# Altium PCB chip.PcbDoc (part 1 of 2)
Units mil, origin at the board's own origin, x right, y up, seen from the top; angles counter-clockwise.
Board outline 3130 x 2410 mil, 2 copper layers (Top Layer, Bottom Layer); 96 components, 117 nets, 462 pads, 172 vias.
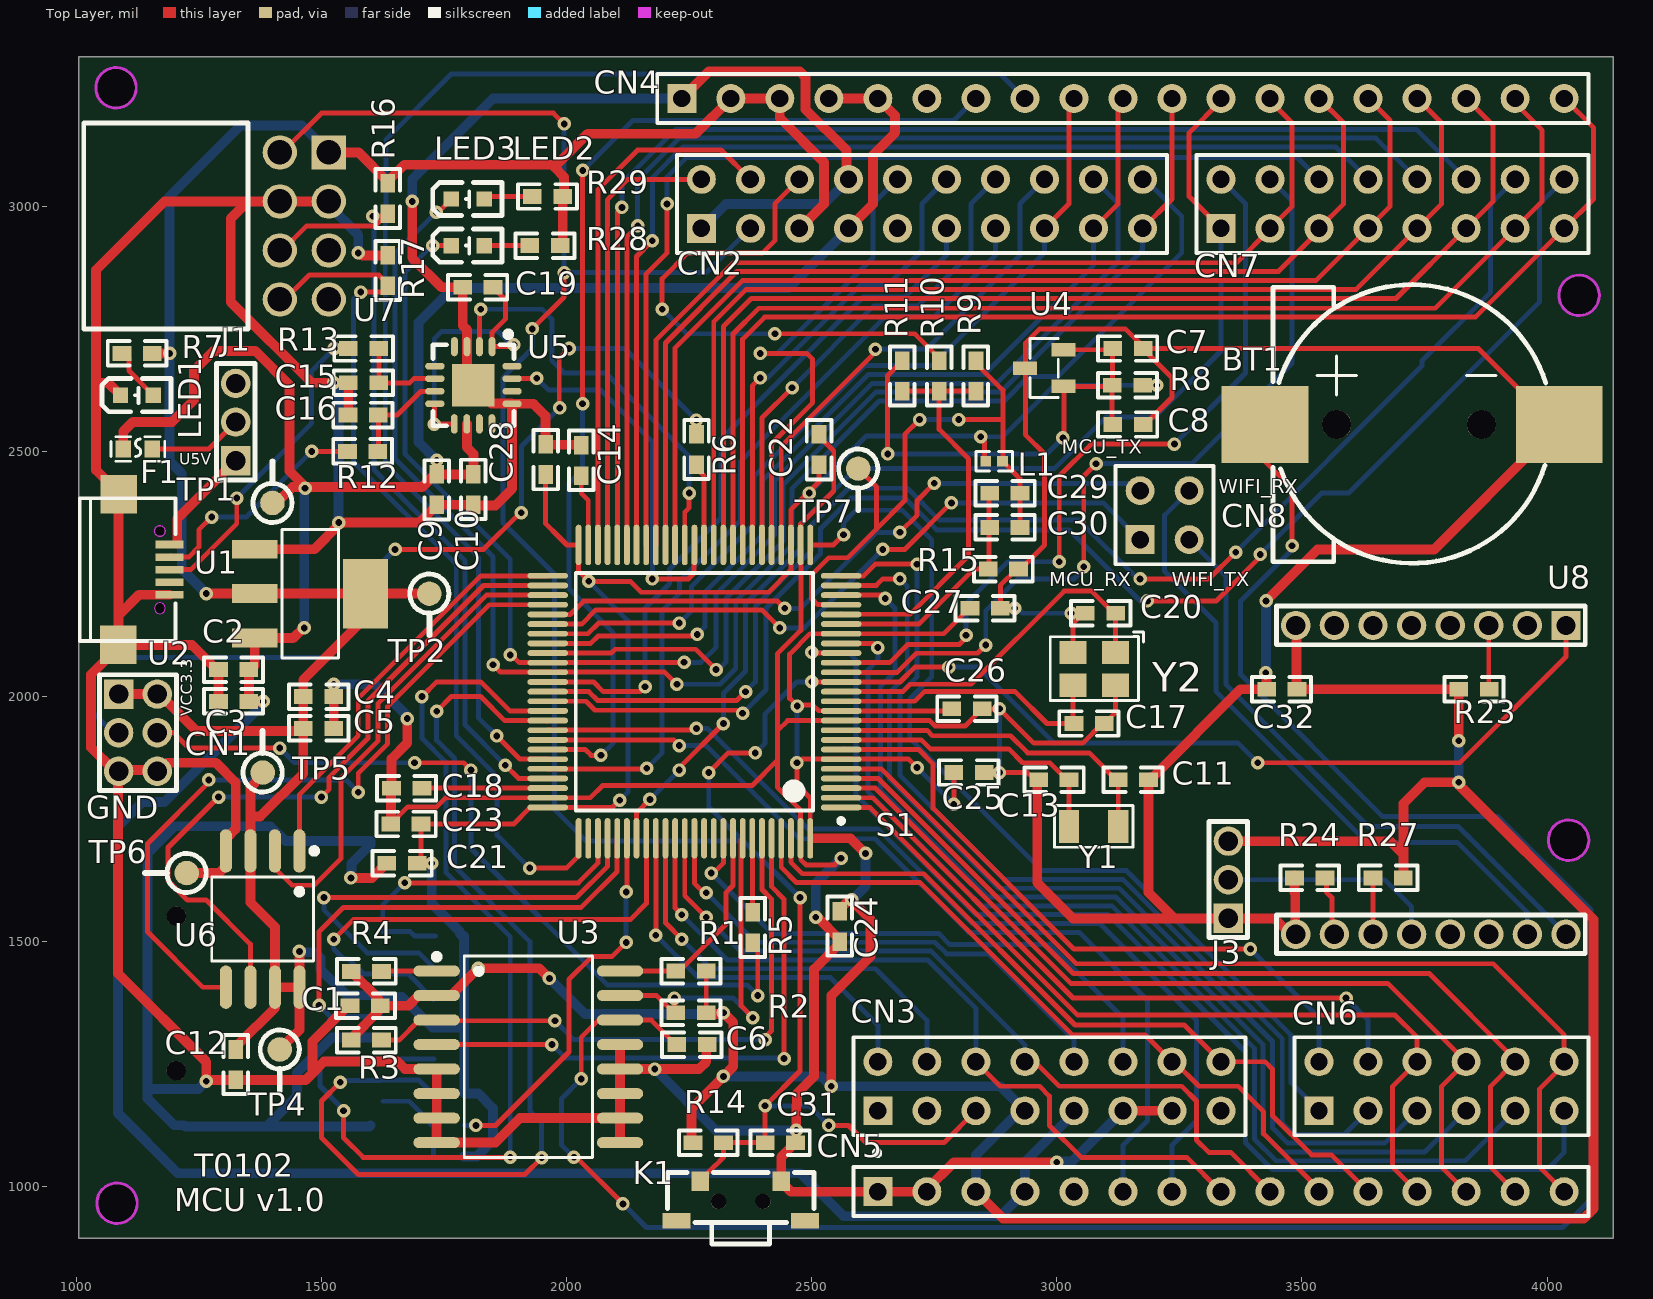
[diagram p0: Top Layer view]
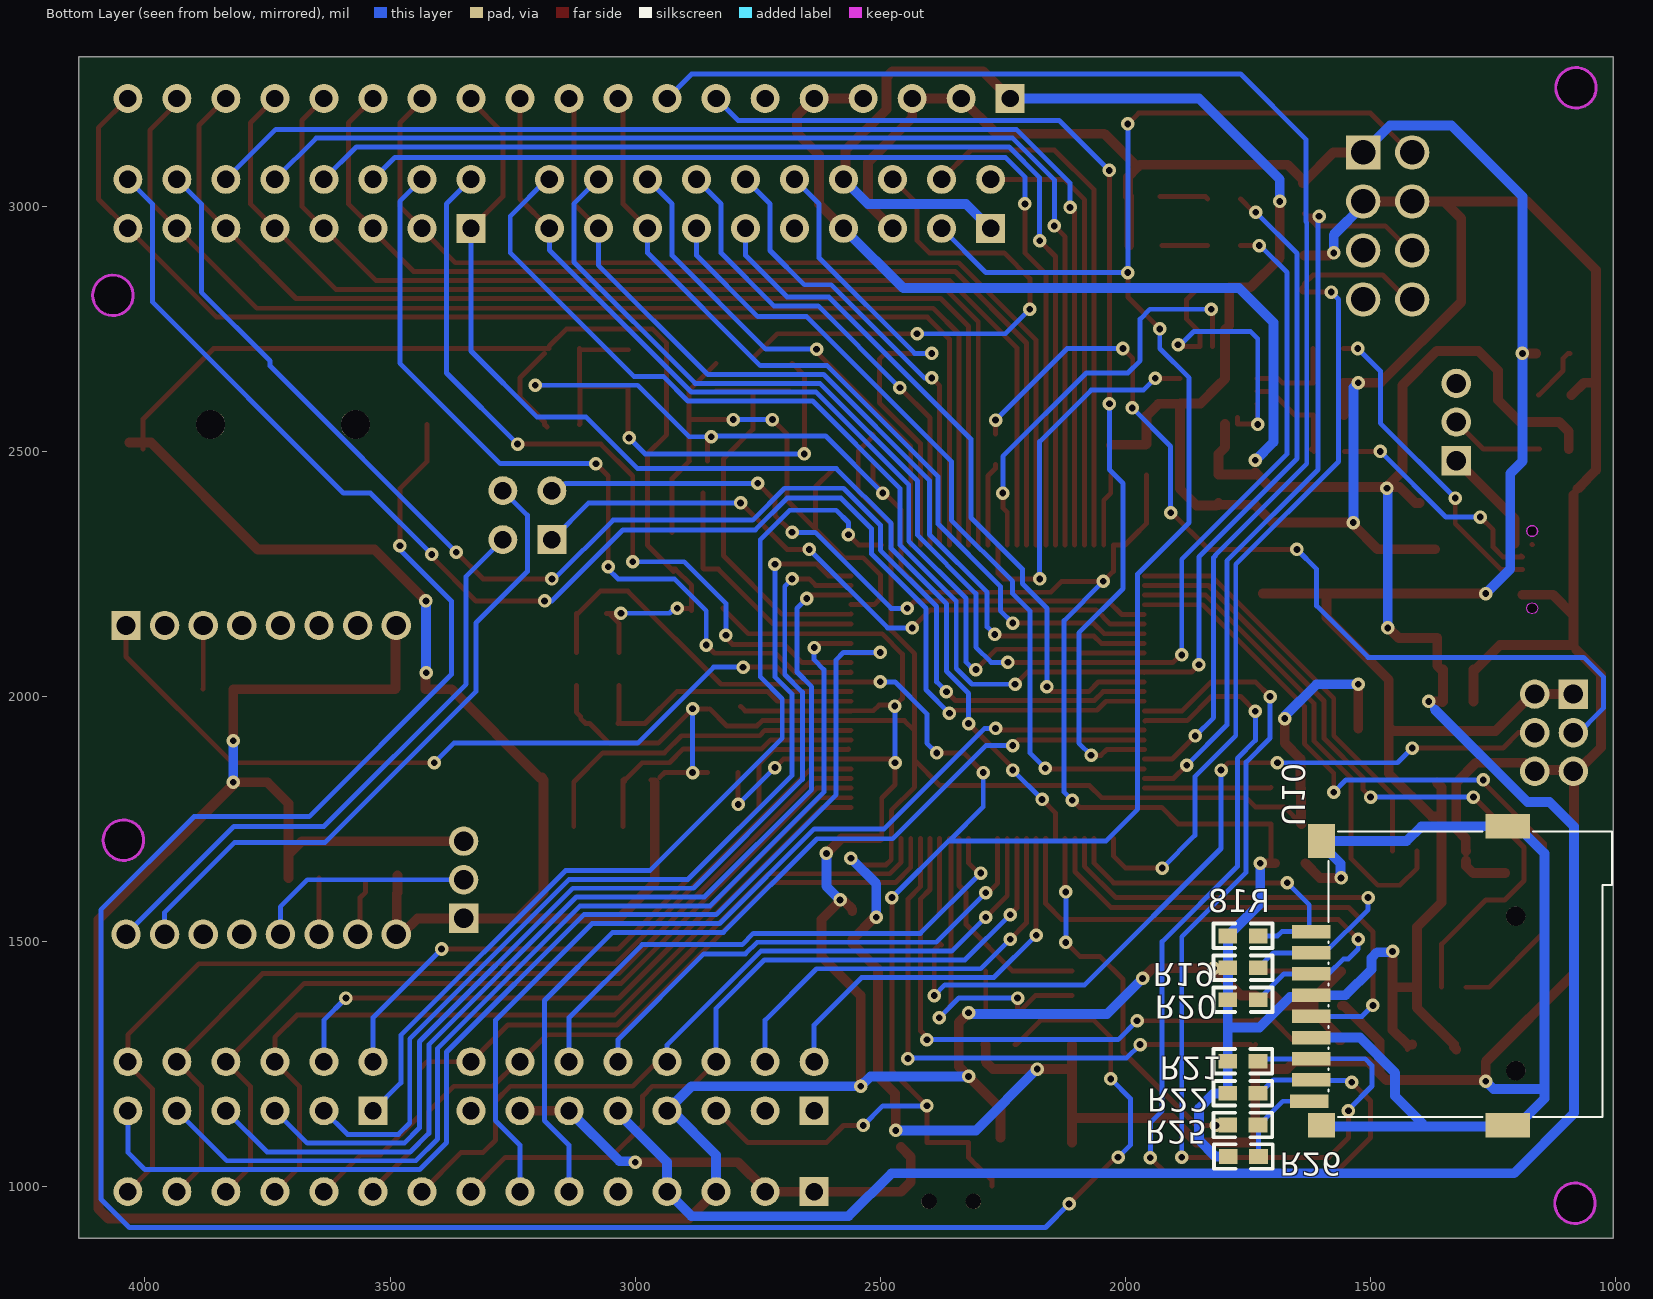
[diagram p1: Bottom Layer view, seen from below]
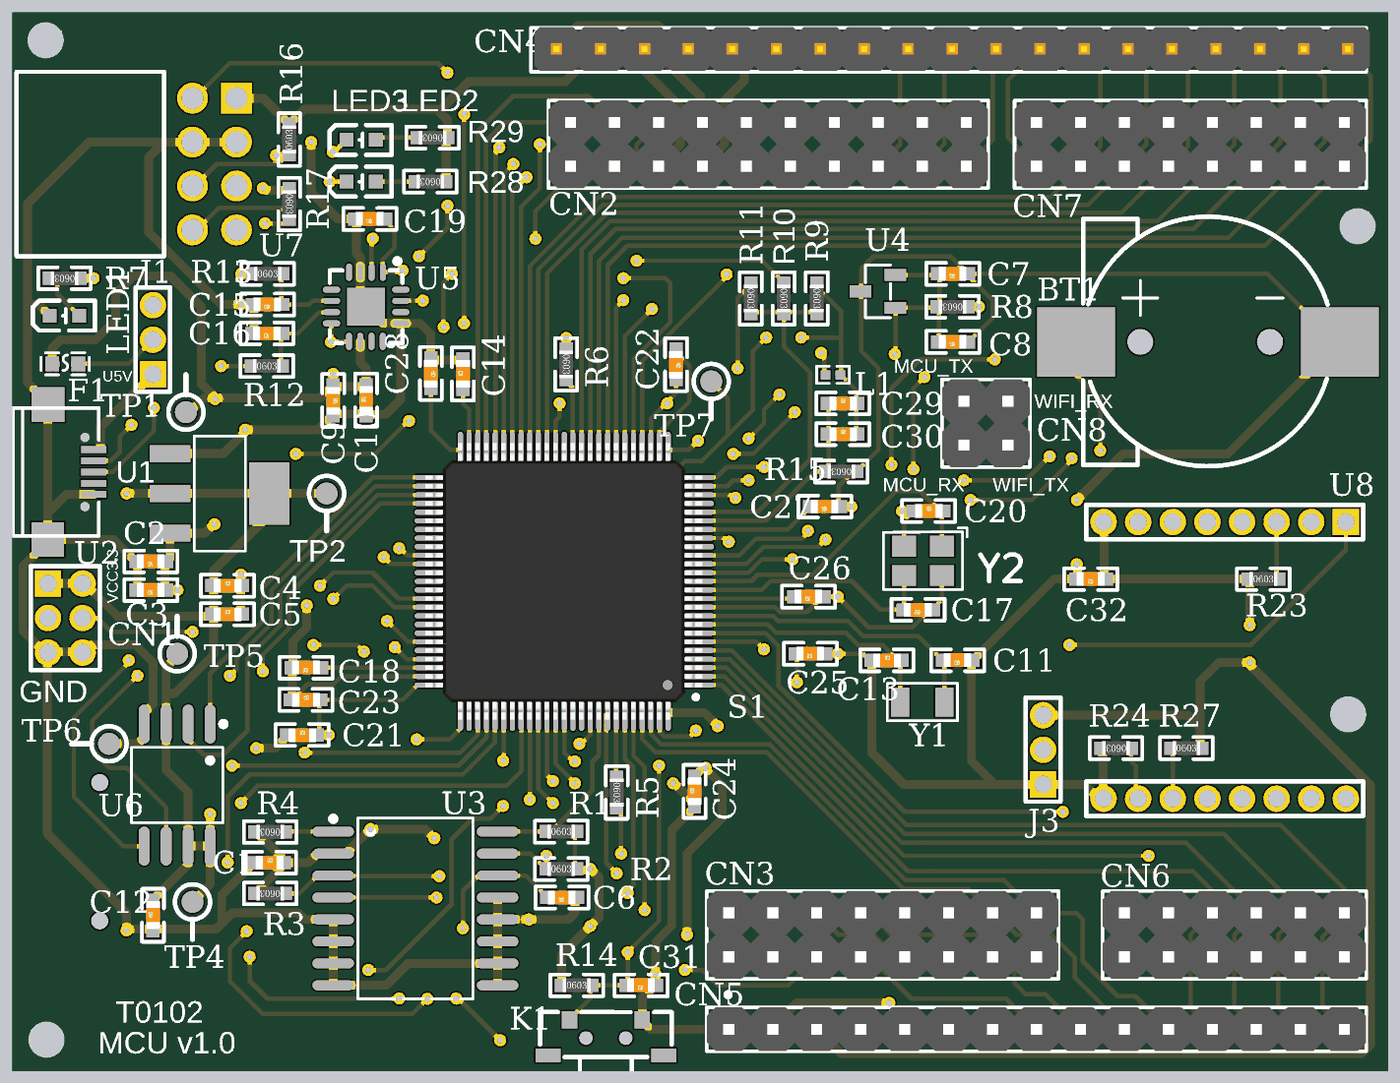
[diagram p3: 3D render of the assembled board from above, using the file's embedded part models]
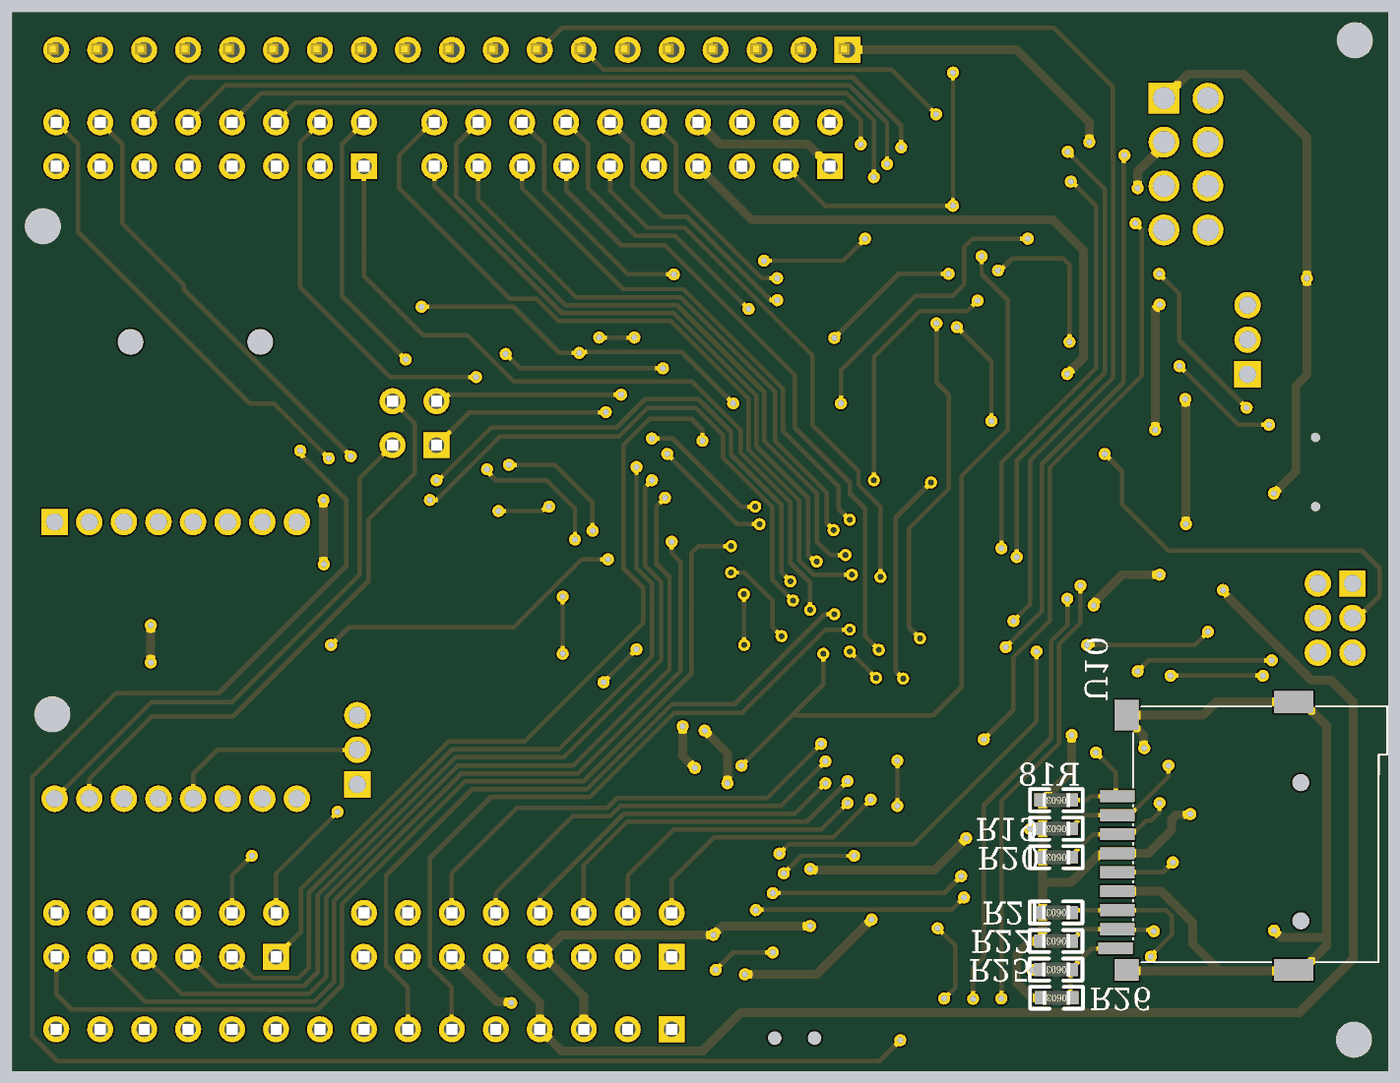
[diagram p4: 3D render of the assembled board from below, using the file's embedded part models]

## Layer stack, top to bottom
Top Solder: solder mask 0.4, Solder Resist, Dk 3.5
Top Layer: signal copper 1.4
Dielectric 1: dielectric 12.6, FR-4, Dk 4.8
Bottom Layer: signal copper 1.4
Bottom Solder: solder mask 0.4, Solder Resist, Dk 3.5

## Board outline
1005,895 4135,895 4135,3305 1005,3305
cut-out: 1080.82,3200.47 cw(c1080.82,3241.81) 1039.48,3241.81 cw(c1080.82,3241.81) 1080.82,3283.15 cw(c1080.82,3241.81) 1122.16,3241.81 cw(c1080.82,3241.81)
cut-out: 4043.97,1665.61 cw(c4043.97,1706.95) 4002.63,1706.95 cw(c4043.97,1706.95) 4043.97,1748.29 cw(c4043.97,1706.95) 4085.31,1706.95 cw(c4043.97,1706.95)
cut-out: 1082.89,925.01 cw(c1082.89,966.35) 1041.55,966.35 cw(c1082.89,966.35) 1082.89,1007.69 cw(c1082.89,966.35) 1124.23,966.35 cw(c1082.89,966.35)
cut-out: 4065.42,2777.03 cw(c4065.42,2818.37) 4024.08,2818.37 cw(c4065.42,2818.37) 4065.42,2859.7 cw(c4065.42,2818.37) 4106.76,2818.37 cw(c4065.42,2818.37)
cut-out: 1005,3230

## Design rules (kind name [scope] priority, off if disabled: settings)
Clearance [All] p1: gap=4 ignorepadtopadclearanceinfootprint=FALSE
MinimumSolderMaskSliver [All] p1: minsoldermaskwidth=0
PolygonConnect [All] p1: connectstyle=Relief reliefconductorwidth=10 reliefentries=4 polygonreliefangle="90 Angle" airgapwidth=10
RoutingVias [All] p1: holewidth=28 width=50 viastyle="Through Hole" minholewidth=28 minwidth=50 maxholewidth=28 maxwidth=50
SilkToSilkClearance [All] p1: silktosilkclearance=0
SilkToSolderMaskClearance [IsPad] p1: minsilkscreentomaskgap=0 clearancetoexposedcopper=TRUE
SolderMaskExpansion [All] p1: expansion=4
Width Width_Power [InNetClass('New Class')] p1: maxlimit=30 minlimit=10 preferedwidth=20
Width [All] p2: maxlimit=20 minlimit=10 preferedwidth=10
27 further rules are at their usual default settings.

## Components (designator, comment, footprint, x,y, rotation, side; value= is the part's Value field where it differs from the comment)
BT1 "Battery" CR1220-2 3329.41,2644.77 r0 top locked value="CR1220-2 电池卧式底座"
C1 "0.1uF" "0603 - CAP" 1558.23,1369.26 r0 top value="100nF(104) ±10% 10V"
C2 "10uF" "0603 - CAP" 1352,2055 r180 top value="10uF(106) ±10% 10V"
C3 "0.1uF" "0603 - CAP" 1352,1990 r180 top value="100nF(104) ±10% 10V"
C4 "10uF" "0603 - CAP" 1463,2000 r0 top value="10uF(106) ±10% 10V"
C5 "0.1uF" "0603 - CAP" 1463,1935 r0 top value="100nF(104) ±10% 10V"
C6 "0.1uF" "0603 - CAP" 2287.01,1290 r180 top value="100nF(104) ±10% 10V"
C7 "0.1uF" "0603 - CAP" 3176,2710 r180 top value="100nF(104) ±10% 10V"
C8 "0.1uF" "0603 - CAP" 3176,2555 r180 top value="100nF(104) ±10% 10V"
C9 "0.1uF" "0603 - CAP" 1735,2453.1 r270 top value="100nF(104) ±10% 10V"
C10 "4.7uF" "0603 - CAP" 1809.88,2391.1 r90 top value="4.7uF ±10% 6.3V"
C11 "22pF" "0603 - CAP" 3187,1830 r180 top value="22pF ±1% 10V"
C12 "0.1uF" "0603 - CAP" 1325,1218 r90 top value="100nF(104) ±10% 10V"
C13 "22pF" "0603 - CAP" 2963,1830 r0 top value="22pF ±1% 10V"
C14 "2.2uF" "0603 - CAP" 2030,2450.5 r90 top value="2.2uF(225) ±10% 10V"
C15 "47pF" "0603 - CAP" 1617,2640.25 r180 top value="47pF ±1% 10V"
C16 "47pF" "0603 - CAP" 1616,2574.25 r180 top value="47pF ±1% 10V"
C17 "22pF" "0603 - CAP" 3097,1945 r180 top value="22pF ±1% 10V"
C18 "2.2uF" "0603 - CAP" 1704.95,1813.15 r180 top value="2.2uF(225) ±10% 10V"
C19 "0.1uF" "0603 - CAP" 1850,2835 r180 top value="100nF(104) ±10% 10V"
C20 "22pF" "0603 - CAP" 3058,2170 r0 top value="22pF ±1% 10V"
C21 "4.7uF" "0603 - CAP" 1633,1660 r0 top value="4.7uF ±10% 6.3V"
C22 "0.1uF" "0603 - CAP" 2515,2535 r270 top value="100nF(104) ±10% 10V"
C23 "0.1uF" "0603 - CAP" 1641.1,1740 r0 top value="100nF(104) ±10% 10V"
C24 "0.1uF" "0603 - CAP" 2557.17,1500.17 r90 top value="100nF(104) ±10% 10V"
C25 "0.1uF" "0603 - CAP" 2852,1845 r180 top value="100nF(104) ±10% 10V"
C26 "0.1uF" "0603 - CAP" 2848.1,1975 r180 top value="100nF(104) ±10% 10V"
C27 "0.1uF" "0603 - CAP" 2885,2180 r180 top value="100nF(104) ±10% 10V"
C28 "0.1uF" "0603 - CAP" 1957.3,2514.88 r270 top value="100nF(104) ±10% 10V"
C29 "1uF" "0603 - CAP" 2863,2415 r0 top value="1uF(105) ±10% 6.3V"
C30 "0.1uF" "0603 - CAP" 2863,2345 r0 top value="100nF(104) ±10% 10V"
C31 "0.1uF" "0603 - CAP" 2467,1090 r180 top value="100nF(104) ±10% 10V"
C32 "0.1uF" "0603 - CAP" 3490,2015 r180 top value="100nF(104) ±10% 10V"
CN1 "HDR2X3" "HDR2X3 - duplicate1" 1211.05,2048.18 r270 top value="杜邦2.0排针直插 镀金 6P 双排 针座连接器"
CN2 "Header 10x2" HDR2X10 2275,2955 r0 top
CN3 "Header 8x2" HDR2X8 2635,1155 r0 top locked
CN4 "Header 19" "HDR1X19 - duplicate" 2235,3220 r0 top locked
CN5 "Header 15" HDR1X15 2635,990 r0 top locked
CN6 "Header 6x2" HDR2X6 3535,1155 r0 top
CN7 "Header 8x2" HDR2X8 3335,2955 r0 top
CN8 "Header 2X2" "HDR2X2 - duplicate" 3170,2320 r0 top locked value="排针 2X2 2.54"
F1 "FUSE" PTC 1181.34,2479.99 r180 top value=1A/32V
J1 "跳线帽" "HDR1X3 - duplicate1" 1437.21,2650.08 r90 top locked
J3 "跳线帽" "HDR1X3 - duplicate1" 3462.21,1716.34 r90 top
K1 "Key" "Key 3*6*3.5侧按" 2205.96,1030.34 r0 top value="轻触开关 3*6*3.5侧按 直径0.6定位柱 白体黑头 250力度"
L1 "120R DCR:0.12 0402" "120R DCR=0.12 0402" 2832.86,2501.37 r0 top value="120Ω(120R) ±1%"
LED1 "LED" 0603-LED 1049,2642 r0 top
LED2 "LED" 0603-LED 1724,2947 r0 top
LED3 "LED" 0603-LED 1724,3042 r0 top
R1 "4.7K" "0603 - RES" 2223,1440 r0 top value="4.7KΩ(472) ±5%"
R2 "4.7K" "0603 - RES" 2223,1355 r0 top value="4.7KΩ(472) ±5%"
R3 "4.7K" "0603 - RES" 1622.5,1299.26 r180 top value="4.7KΩ(472) ±5%"
R4 "4.7K" "0603 - RES" 1622.5,1439.26 r180 top value="4.7KΩ(472) ±5%"
R5 "1K" "0603 - RES" 2380,1560 r270 top value="1KΩ(1K) ±1% 50PPM"
R6 "1K" "0603 - RES" 2265,2535 r270 top value="1KΩ(1K) ±1% 50PPM"
R7 "1K" "0603 - RES" 1155,2700 r180 top value="1KΩ(1K) ±1% 50PPM"
R8 "10K" "0603 - RES" 3175,2635 r180 top value="10KΩ ±1%"
R9 "0" "0603 - RES" 2835,2685 r270 top value="0Ω(0000) ±1%"
R10 "0" "0603 - RES" 2760,2685 r270 top value="0Ω(0000) ±1%"
R11 "0" "0603 - RES" 2685,2685 r270 top value="0Ω(0000) ±1%"
R12 "27R" "0603 - RES" 1553,2500 r0 top value="27Ω ±1%"
R13 "27R" "0603 - RES" 1555,2710 r0 top value="27Ω ±1%"
R14 "10K" "0603 - RES" 2258,1090 r0 top value="10KΩ ±1%"
R15 "10K" "0603 - RES" 2922,2260 r180 top value="10KΩ ±1%"
R16 "10K" "0603 - RES" 1635,2985 r90 top value="10KΩ ±1%"
R17 "10K" "0603 - RES" 1635,2900 r270 top value="10KΩ ±1%"
R18 "10K" "0603 - RES" 1729,1511.7 r0 bottom value="10KΩ ±1%"
R19 "10K" "0603 - RES" 1729,1446.7 r0 bottom value="10KΩ ±1%"
R20 "10K" "0603 - RES" 1729,1381.7 r0 bottom value="10KΩ ±1%"
R21 "10K" "0603 - RES" 1729.44,1255.95 r0 bottom value="10KΩ ±1%"
R22 "10K" "0603 - RES" 1729.44,1190.95 r0 bottom value="10KΩ ±1%"
R23 "10K" "0603 - RES" 3820,2015 r0 top value="10KΩ ±1%"
R24 "10K" "0603 - RES" 3547,1630 r180 top value="10KΩ ±1%"
R25 "0" "0603 - RES" 1729.44,1125.95 r0 bottom value="0Ω(0000) ±1%"
R26 "10K" "0603 - RES" 1728.4,1061.7 r0 bottom value="10KΩ ±1%"
R27 "10K" "0603 - RES" 3645,1630 r0 top value="10KΩ ±1%"
R28 "1K" "0603 - RES" 1987,2920 r180 top value="1KΩ(1K) ±1% 50PPM"
R29 "1K" "0603 - RES" 1992,3020 r180 top value="1KΩ(1K) ±1% 50PPM"
S1 "STM32F427VIT6" LQFP100_M 2260.79,2010 r180 top locked
TP1 "TP" Test-1 1400,2395 r270 top
TP2 "TP" Test-1 1720,2210 r90 top
TP4 "TP" Test-1 1415,1280 r90 top
TP5 "TP" Test-1 1380,1845 r270 top
TP6 "TP" Test-1 1225,1640 r0 top
TP7 "TP" Test-1 2595,2465 r90 top locked
U1 "ME1117A33B3G-3.3" ME1117A33B3G 1542.06,2084.95 r180 top value=AMS1117-3.3
U2 "Micro USB" USB-C46389 1043.83,2060.82 r0 top value=C46389
U3 "DS3231SN#" SOIC-16_300mil 2054.75,1547.02 r270 top locked value=DS3231SN#T&R
U4 "TL431BIDBZR" SOT-23-3 2929.39,2705.91 r0 top
U5 "FT230XQ" QFN-16_4x4x065p 1902.42,2541.81 r180 top value=FT230XQ-R
U6 "W25Q" SOIC-8_208mil 1487.12,1418.29 r180 top locked value=W25Q80DVSSIG
U7 "SWD" SWD-8p 1550,3175.18 r270 top value=8P,脚距2.54mm
U8 "ESP-12F" "ESP-12 slice" 3177.88,2010.21 r270 top locked value=ESP-12F(ESP8266MOD)
U10 "TF Card" TF-015 1568,1107.3 r90 bottom locked value=TF-015
Y1 "32.768KHZ 12.5PF 20ppm" SMD-3215-2p 2996,1780 r0 top
Y2 "SMD_3225" "SMD-3225 4p" 3167.69,1990.49 r180 top value="25MHz 10PF 30PPM -40~+85℃"

## Footprints (in the part's own frame and the unit in brackets; to place one, negate y for a bottom-side part, rotate by r counter-clockwise, add the part's x,y. Pads: shape width x height; smd on the part's side, far side on the other; paste and mask are expansions set on the pad)
"120R DCR=0.12 0402" [mm]
  rect 0.566x0.54 smd: 1(0.562,-0.543) 2(1.428,-0.543)
  silkscreen extent 0.05,-1.04 1.94,-0.04
"0603 - CAP" [mil]
  rect 38x30 smd: 1(0,0) 2(62,0)
  silkscreen extent -29,-25 92,25, body extent 1,-16 63,15, height 12
"0603 - RES" [mil]
  rect 38x30 smd: 1(0,0) 2(62,0)
  silkscreen extent -29,-25 91,25, body extent 0,-16 62,16, height 18
0603-LED [mil]
  rect 31.5x31.5 smd: 1(108,-27) 2(41,-27)
  silkscreen extent 3,-61 144,7
CR1220-2 [mm]
  rect 4.5x4 smd: 1(2.428,-2.28) 2(17.668,-2.28)
  round 1.5 hole 1.5 unplated: ""(6.136,-2.28) ""(13.629,-2.28)
  silkscreen extent 2.83,-9.47 16.97,4.97
"ESP-12 slice" [mil] "2.00mm 8pin  排母"
  rect 60x60 hole 39.37: 1(-134.79,860.82)
  round 60 hole 39.37: 2(-134.79,782.08) 3(-134.79,703.34) 4(-134.79,624.6) 5(-134.79,545.86) 6(-134.79,467.12) 7(-134.79,388.38) 8(-134.79,309.64) 15(495.21,309.64) 16(495.21,388.38) 17(495.21,467.12) 18(495.21,545.86) 19(495.21,624.6) 20(495.21,703.34) 21(495.21,782.08) 22(495.21,860.82)
  silkscreen extent -174,270 535,900
"HDR1X3 - duplicate1" [mil] "2mm 3 pin 排针"
  rect 60x60 hole 39.37: 1(-168.82,112.21)
  round 60 hole 39.37: 2(-90.08,112.21) 3(-11.34,112.21)
  Top Layer region: 3,4 3,4 3,4 3,4
  Top Layer region: 3,4 3,4 3,4 3,4
  Top Layer region: 3,4 3,4 3,4 3,4
  silkscreen extent -208,73 29,152
HDR1X15 [mm] "Connector; Header; 15 Position"
  rect 1.5x1.5 hole 0.9: 1(0,0)
  round 1.5 hole 0.9: 2(2.54,0) 3(5.08,0) 4(7.62,0) 5(10.16,0) 6(12.7,0) 7(15.24,0) 8(17.78,0) 9(20.32,0) 10(22.86,0) 11(25.4,0) 12(27.94,0) 13(30.48,0) 14(33.02,0) 15(35.56,0)
  silkscreen extent -1.27,-1.27 36.83,2.14, body extent -1.27,-1.27 36.83,1.27, height 8.54
"HDR1X19 - duplicate" [mm] "Connector; Header; 19 Position"
  rect 1.5x1.5 hole 0.9: 1(0,0)
  round 1.5 hole 0.9: 2(2.54,0) 3(5.08,0) 4(7.62,0) 5(10.16,0) 6(12.7,0) 7(15.24,0) 8(17.78,0) 9(20.32,0) 10(22.86,0) 11(25.4,0) 12(27.94,0) 13(30.48,0) 14(33.02,0) 15(35.56,0) 16(38.1,0) 17(40.64,0) 18(43.18,0) 19(45.72,0)
  silkscreen extent -1.27,-1.27 46.99,1.27, body extent -1.07,-1.22 47.19,1.32, height 10.1
"HDR2X2 - duplicate" [mm] "Connector; Header; 2x2 Position"
  rect 1.5x1.5 hole 0.9: 1(0,0)
  round 1.5 hole 0.9: 2(0,2.54) 3(2.54,0) 4(2.54,2.54)
  silkscreen extent -1.27,-1.27 3.81,3.81, body extent -1.27,-1.27 3.81,3.81, height 8.54
"HDR2X3 - duplicate1" [mil] "2mm 2x3pin 排针"
  rect 60x60 hole 39.37: 1(43.18,-124.79)
  round 60 hole 39.37: 2(43.18,-46.05) 3(121.92,-124.79) 4(121.92,-46.05) 5(200.66,-124.79) 6(200.66,-46.05)
  silkscreen extent 4,-164 240,-7
HDR2X6 [mm] "Connector; Header; 6x2 Position"
  rect 1.5x1.5 hole 0.9: 1(0,0)
  round 1.5 hole 0.9: 2(0,2.54) 3(2.54,0) 4(2.54,2.54) 5(5.08,0) 6(5.08,2.54) 7(7.62,0) 8(7.62,2.54) 9(10.16,0) 10(10.16,2.54) 11(12.7,0) 12(12.7,2.54)
  silkscreen extent -1.27,-1.27 13.97,3.81, body extent -1.27,-1.27 13.97,3.81, height 8.54
HDR2X8 [mm] "Connector; Header; 8x2 Position"
  rect 1.5x1.5 hole 0.9: 1(0,0)
  round 1.5 hole 0.9: 2(0,2.54) 3(2.54,0) 4(2.54,2.54) 5(5.08,0) 6(5.08,2.54) 7(7.62,0) 8(7.62,2.54) 9(10.16,0) 10(10.16,2.54) 11(12.7,0) 12(12.7,2.54) 13(15.24,0) 14(15.24,2.54) 15(17.78,0) 16(17.78,2.54)
  silkscreen extent -1.27,-1.27 19.05,3.81, body extent -1.27,-1.27 19.05,3.81, height 8.54
HDR2X10 [mm] "Connector; Header; 10x2 Position"
  rect 1.5x1.5 hole 0.9: 1(0,0)
  round 1.5 hole 0.9: 2(0,2.54) 3(2.54,0) 4(2.54,2.54) 5(5.08,0) 6(5.08,2.54) 7(7.62,0) 8(7.62,2.54) 9(10.16,0) 10(10.16,2.54) 11(12.7,0) 12(12.7,2.54) 13(15.24,0) 14(15.24,2.54) 15(17.78,0) 16(17.78,2.54) 17(20.32,0) 18(20.32,2.54) 19(22.86,0) 20(22.86,2.54)
  silkscreen extent -1.27,-1.27 24.13,3.81, body extent -1.27,-1.27 24.13,3.81, height 8.54
"Key 3*6*3.5侧按" [mm]
  rect 1.45x0.8 smd: A(0.455,-2.533) B(7.131,-2.533)
  rect 0.9x1 smd: C(1.693,-0.483) D(5.893,-0.483)
  round 0.8 hole 0.8 unplated: ""(2.643,-1.533) ""(4.943,-1.533)
  silkscreen extent -0.01,-3.73 7.59,-0.03
LQFP100_M [mm]
  oval 2.1x0.3 smd: 1(-7.6,6) 2(-7.6,5.5) 3(-7.6,5) 4(-7.6,4.5) 5(-7.6,4) 6(-7.6,3.5) 7(-7.6,3) 8(-7.6,2.5) 9(-7.6,2) 10(-7.6,1.5) 11(-7.6,1) 12(-7.6,0.5) 13(-7.6,0) 14(-7.6,-0.5) 15(-7.6,-1) 16(-7.6,-1.5) 17(-7.6,-2) 18(-7.6,-2.5) 19(-7.6,-3) 20(-7.6,-3.5) 21(-7.6,-4) 22(-7.6,-4.5) 23(-7.6,-5) 24(-7.6,-5.5) 25(-7.6,-6) 51(7.6,-6) 52(7.6,-5.5) 53(7.6,-5) 54(7.6,-4.5) 55(7.6,-4) 56(7.6,-3.5) 57(7.6,-3) 58(7.6,-2.5) 59(7.6,-2) 60(7.6,-1.5) 61(7.6,-1) 62(7.6,-0.5) 63(7.6,0) 64(7.6,0.5) 65(7.6,1) 66(7.6,1.5) 67(7.6,2) 68(7.6,2.5) 69(7.6,3) 70(7.6,3.5) 71(7.6,4) 72(7.6,4.5) 73(7.6,5) 74(7.6,5.5) 75(7.6,6)
  oval 0.3x2.1 smd: 26(-6,-7.6) 27(-5.5,-7.6) 28(-5,-7.6) 29(-4.5,-7.6) 30(-4,-7.6) 31(-3.5,-7.6) 32(-3,-7.6) 33(-2.5,-7.6) 34(-2,-7.6) 35(-1.5,-7.6) 36(-1,-7.6) 37(-0.5,-7.6) 38(0,-7.6) 39(0.5,-7.6) 40(1,-7.6) 41(1.5,-7.6) 42(2,-7.6) 43(2.5,-7.6) 44(3,-7.6) 45(3.5,-7.6) 46(4,-7.6) 47(4.5,-7.6) 48(5,-7.6) 49(5.5,-7.6) 50(6,-7.6) 76(6,7.6) 77(5.5,7.6) 78(5,7.6) 79(4.5,7.6) 80(4,7.6) 81(3.5,7.6) 82(3,7.6) 83(2.5,7.6) 84(2,7.6) 85(1.5,7.6) 86(1,7.6) 87(0.5,7.6) 88(0,7.6) 89(-0.5,7.6) 90(-1,7.6) 91(-1.5,7.6) 92(-2,7.6) 93(-2.5,7.6) 94(-3,7.6) 95(-3.5,7.6) 96(-4,7.6) 97(-4.5,7.6) 98(-5,7.6) 99(-5.5,7.6) 100(-6,7.6)
  silkscreen extent -7.73,-6.15 6.15,6.82, body extent -7.97,-7.99 8.03,8.01, height 1.63
ME1117A33B3G [mm]
  rect 2.34x0.98 smd: 1(4.522,-5.476) 2(4.522,-3.176) 3(4.522,-0.876)
  rect 2.34x3.6 smd: 4(-1.218,-3.176)
  silkscreen extent 0.18,-6.5 3.12,0.15
PTC [mil]
  rect 31.75x34.02 smd: 1(26.34,-25.01) 2(85.65,-25.01)
  silkscreen extent 1,-50 111,0
QFN-16_4x4x065p [mm]
  oval 0.35x1 smd: 1(1.382,-4.367) 2(2.033,-4.367) 3(2.683,-4.367) 4(3.333,-4.367) 9(3.338,-0.367) 10(2.688,-0.367) 11(2.038,-0.367) 12(1.387,-0.367)
  oval 1x0.35 smd: 5(4.348,-3.358) 6(4.348,-2.707) 7(4.348,-2.057) 8(4.348,-1.407) 13(0.348,-1.407) 14(0.348,-2.057) 15(0.348,-2.707) 16(0.348,-3.358)
  rect 2.2x2.2 smd: 17(2.348,-2.367)
  silkscreen extent 0.25,-5.16 4.45,-0.27
SMD-3215-2p [mm]
  rect 1.05x1.7 smd: 1(0.737,-1.143) 2(3.287,-1.143)
  silkscreen extent -0.02,-2.22 4.04,-0.06
"SMD-3225 4p" [mm]
  rect 1.4x1.2 smd: 1(1.211,-2.527) 2(3.411,-2.527) 3(3.411,-0.825) 4(1.211,-0.826)
  silkscreen extent -0.23,-3.58 4.6,-0.03
SOIC-8_208mil [mm]
  oval 0.63x2.25 smd: 1(0.816,-6.774) 2(2.086,-6.774) 3(3.356,-6.774) 4(4.626,-6.774) 5(4.626,0.286) 6(3.356,0.286) 7(2.086,0.286) 8(0.816,0.286)
  silkscreen extent -0.1,-6.92 5.36,-1.07
SOIC-16_300mil [mil]
  oval 22.6x94.51 smd: 1(107.02,-319.75) 2(157.02,-319.75) 3(207.02,-319.75) 4(257.02,-319.75) 5(307.02,-319.75) 6(357.02,-319.75) 7(407.02,-319.75) 8(457.02,-319.75) 9(457.02,54.29) 10(407.02,54.29) 11(357.02,54.29) 12(307.02,54.29) 13(257.02,54.29) 14(207.02,54.29) 15(157.02,54.29) 16(107.02,54.29)
  silkscreen extent 72,-326 488,-2
SOT-23-3 [mm]
  rect 1.25x0.7 smd: 1(2.142,-1.862) 2(2.142,0.038) 3(0.142,-0.912)
  silkscreen extent 0.42,-2.44 1.87,0.61
SWD-8p [mil]
  rect 70x70 hole 50: 1(65.18,-35)
  round 70 hole 50: 2(65.18,-135) 3(165.18,-35) 4(165.18,-135) 5(265.18,-35) 6(265.18,-135) 7(365.18,-35) 8(365.18,-135)
  silkscreen extent 5,-535 425,-200
Test-1 [mil]
  round 50 smd: 1(0,0)
  silkscreen extent -85,-40 40,40
TF-015 [mm] "Micro TF"
  rect 0.7x2 smd: 1(10.496,1.352) 2(9.396,1.351) 3(8.3,1.352) 4(7.2,1.352) 5(6.102,1.352) 6(5.003,1.352) 7(3.907,1.352) 8(2.809,1.352) 9(1.705,1.452)
  rect 1.27x1.397 smd: 10(0.457,0.814)
  rect 1.27x2.286 smd: 11(0.457,-8.838) 12(15.951,-8.838)
  rect 1.778x1.397 smd: 13(15.189,0.814)
  round 1 hole 1 unplated: ""(3.289,-9.249) ""(11.288,-9.247)
  silkscreen extent 0.89,-14.25 15.69,0.45
USB-C46389 [mm]
  rect 1.45x0.4 smd: 1(3.713,6.329) 2(3.713,5.679) 3(3.713,5.029) 4(3.713,4.379) 5(3.713,3.729)
  rect 1.9x2 smd: 6(1.088,8.929) 7(1.063,1.129)
  Keep-Out Layer board cut-out: 3.212,6.749 3.105,6.771 3.014,6.831 2.954,6.922 2.932,7.029 2.932,7.029 2.954,7.136 3.014,7.227 3.105,7.288 3.212,7.309 3.212,7.309 3.32,7.288 3.41,7.227 3.471,7.136 3.492,7.029 3.492,7.029 3.471,6.922 3.41,6.831 3.32,6.771 3.212,6.749
  Keep-Out Layer board cut-out: 2.932,3.029 2.954,2.922 3.014,2.831 3.105,2.771 3.212,2.749 3.212,2.749 3.32,2.771 3.41,2.831 3.471,2.922 3.492,3.029 3.492,3.029 3.471,3.136 3.41,3.227 3.32,3.288 3.212,3.309 3.212,3.309 3.105,3.288 3.014,3.227 2.954,3.136 2.932,3.029
  Keep-Out Layer circle w0.051: c3.212,3.029 r0.28
  Keep-Out Layer circle w0.051: c3.212,7.029 r0.28
  silkscreen extent -0.94,1.33 4.01,8.73

## Part data
BT1: Manufactor=Q&J, Package=CR1220
C1 C2 C3 C4 C5 C6 C7 C8 C9 C12 C19 C22 C23 C24 C25 C26 C27 C28 C29 C30 C31 C32: library part Capacity_normal, Manufactor=YAGEO(国巨), Package=0603
C10 C21: library part Capacity_normal, Manufactor=muRata(村田), Package=0603
C11 C13 C17 C20: library part Capacity_normal, Manufactor=Knowles(楼氏), Package=0603
C14 C18: library part Capacity_normal, Manufactor=SAMSUNG(三星), Package=0603
C15 C16: library part Capacity_normal, Manufactor=KEMET(基美), Package=0603
CN1: Manufactor=CJT(长江连接器), Package="Through Hole,P=2mm"
CN2: "10x2 双排，2.54mm间距"
CN3 CN7: "8x2双排，2.54mm间距"
CN4: "19 单排，2.54mm间距"
CN5: "15 单排，2.54mm间距"
CN6: "6x2 双排，2.54mm间距"
F1: Manufactor=良胜, Package=SMD0603
J1 J3: library part "Header 3", "Header,3-pin", Package="2mm 1X3排针"
K1: Manufactor="SHOU HAN(首韩)", Package=SMD
L1: library part "电感 120", Manufactor=RESI(开步睿思）, Package=0603
LED1 LED2 LED3: Manufactor=台湾亿光, Package=0603
R1 R2 R3 R4 R5 R6 R7 R9 R10 R11 R25 R28 R29: library part RES, Manufactor=YAGEO(国巨), Package=0603
R8 R12 R13 R14 R15 R16 R17 R18 R19 R20 R21 R22 R23 R24 R26 R27: library part RES, Manufactor=UNI-ROYAL(厚声), Package=0603
S1: Manufactor=ST, Package=LQFP100
TP1 TP2 TP4 TP5 TP6 TP7: "Test Point"
U1: Manufactor=MICRONE(南京微盟), Package=SOT-223
U2: Manufactor=精拓金, Package=SMD
U3: "实时时钟芯片，SOIC_16", Manufactor=MAXIM(美信), Package=SOIC-16_300mil
U4: Manufactor=TI(德州仪器), Package=SOT-23(SOT-23-3)
U5: "USB转串口 ，QFN-16", Manufactor=FTDI(飞特帝亚), Package=QFN-16_4x4x065P
U6: "W25Q，WSON-8", Manufactor=WINBOND(华邦), Package=SOIC-8_208mil
U7: "SWD接口", Manufactor=CJT(长江连接器), Package="Through Hole,P=2.54mm"
U8: Manufactor=Ai-Thinker(安信可), Package="WIFI Module"
U10: "TF card,TF-15x15", Manufactor=SOFNG(硕方)
Y1: library part SMD-3215, Manufactor=TAITIEN(泰艺电子), Package=SMD-3215-2P
Y2: Manufactor=TAITIEN(泰艺电, Package=SMD-3225_4P

## Via types
v1: diameter 27.56, hole 13.78, Top Layer to Bottom Layer, 172 vias

## Nets (pads, with @x,y where several pads share a name; then routed paths per layer and width w, separated by ;. In a path a pad name is that pad's centre, name@x,y a point inside that pad or via, vN(x,y) a via of type N, cw(c..) or ccw(c..) an arc to the next point about the centre after c; other vN are vias at no path point)
AGND: C29.1 C30.1 R15.2 S1.20 | length 502.3
  Top Layer w10: S1.20@2560,2147.8 2718.25,2147.8 2830.46,2260 R15.2@2860,2260 2861.9,2261.9 C29.1@2861.9,2415
BOOT0: R5.1 S1.94 | length 151.2
  Top Layer w10: S1.94@2378.9,1710.79 2378.9,1561.1 R5.1@2380,1560
BOOT1: R6.2 S1.37 | length 170.2
  Top Layer w10: R6.2@2265,2473 2265,2465.47 2280.47,2450 S1.37@2280.47,2309.21
DEBUG_UART7_RX: S1.38 U5.15 | length 767.6
  Top Layer w10: U5.15@1888.74,2648.4 1889.46,2649.12 v1(1939.12,2649.12) ; v1(2175,2240) 2248.66,2240 2260,2251.34 S1.38@2260,2309.21
  Bottom Layer w10: v1(1939.12,2649.12) 1963.25,2625 2070,2625 2175,2520 v1(2175,2240)
DEBUG_UART7_TX: S1.39 U5.2 | length 860.9
  Top Layer w10: U5.2@1822.4,2713.74 1822.4,2787.4 v1(1825,2790) ; S1.39@2241.1,2309.21 2241.1,2376.1 2250,2385 v1(2250,2415)
  Bottom Layer w10: v1(1825,2790) 1950,2790 1970,2770 1970,2685 1995,2660 2080,2660 2250,2490 v1(2250,2415)
ESP12F_Debug_TX: CN5.5
EVIN5V: J1.3
EXT_ADC0: CN6.1 S1.26 | length 1947.2
  Top Layer w10: S1.26@2497.01,2309.21 2544.21,2309.21 v1(2565,2330)
  Bottom Layer w10: v1(2565,2330) 2565,2355 2590,2380 2685,2380 2745,2320 2745,2040 2700,1995 2700,1915 2970,1645 3142.28,1645 3478,1309.28 3478,1212 CN6.1@3535,1155
EXT_ADC1: CN6.3 S1.25 | length 1988.9
  Top Layer w10: S1.25@2560,2246.22 2606.22,2246.22 2630,2270 v1(2715,2270)
  Bottom Layer w10: v1(2715,2270) 2715,2040 2680,2005 2680,1839.34 2892.34,1627 3134.82,1627 3460,1301.82 3460,1130 3483,1107 3587,1107 CN6.3@3635,1155
EXT_ADC2: CN6.5 S1.24 | length 2069.7
  Top Layer w10: S1.24@2560,2226.54 2560.35,2226.88 2631.88,2226.88 2645,2240 v1(2680,2240)
  Bottom Layer w10: v1(2680,2240) 2695,2225 2695,2045 2659,2009 2659,1831 2881,1609 3127.37,1609 3440,1296.37 3440,1120 3471,1089 3669,1089 CN6.5@3735,1155
EXT_ADC3: CN6.7 S1.23 | length 2150.4
  Top Layer w10: S1.23@2560,2206.85 2643.15,2206.85 v1(2650,2200)
  Bottom Layer w10: v1(2650,2200) 2670,2180 2670,2050 2640,2020 2640,1810 2859,1591 3119.91,1591 3421,1289.91 3421,1109 3459,1071 3751,1071 CN6.7@3835,1155 CN6.7@3840,1155
EXT_ADC4: CN6.9 S1.18 | length 2163.9
  Top Layer w10: S1.18@2560,2108.43 2626.57,2108.43 v1(2635,2100)
  Bottom Layer w10: v1(2635,2100) 2635,2075 2615,2055 2615,1805 2847,1573 3112.46,1573 3403,1282.46 3403,1097.46 3447.46,1053 3833,1053 CN6.9@3935,1155
EXT_ADC5: CN6.11 S1.17 | length 2401.5
  Top Layer w10: v1(2500,2090) 2500.91,2089.09 2559.65,2089.09 S1.17@2560,2088.74
  Bottom Layer w10: v1(2500,2090) 2575,2090 2590,2075 2590,1800 2835,1555 3105,1555 3385,1275 3385,1090 3440,1035 4000,1035 4035,1070 CN6.11@4035,1155
EXT_AIN0: CN7.2 S1.16 | length 1629
  Top Layer w10: S1.16@2560,2069.05 2659.05,2069.05 2696.22,2106.22 2801.22,2106.22 2815,2120 v1(2815,2125) ; v1(3005,2275) 3005,2450 3070,2515 v1(3240,2515)
  Bottom Layer w10: v1(2815,2125) 2815,2190 2900,2275 v1(3005,2275) ; v1(3240,2515) 3385,2660 3385,3005 CN7.2@3335,3055
EXT_AIN1: CN7.4 S1.15 | length 1728.1
  Top Layer w10: S1.15@2560.63,2050 S1.15@2560,2049.37 2674.37,2049.37 2713.22,2088.22 2838.22,2088.22 v1(2855,2105) ; v1(3055,2265) 3055,2450 v1(3080,2475)
  Bottom Layer w10: v1(2855,2105) 2855,2175 2920,2240 3035,2240 3055,2260 v1(3055,2265) ; v1(3080,2475) 3275,2475 3480,2680 3480,3010 CN7.4@3435,3055
EXT_AREF: CN2.6 R10.1 | length 1076.7
  Top Layer w10: v1(2195,2790) 2195,2852.44 2247.56,2905 2400,2905 2425,2930 2425,3005 CN2.6@2475,3055 ; v1(2425,2740) 2710,2740 R10.1@2760,2690
  Bottom Layer w10: v1(2195,2790) 2245,2740 v1(2425,2740)
EXT_GPIO_1: CN7.6 S1.43 | length 2133.7
  Top Layer w10: S1.43@2162.36,2309.21 2162.36,2862.36 2205,2905 v1(2205,3005)
  Bottom Layer w10: v1(2205,3005) 2205,3060 2245,3100 3490,3100 CN7.6@3535,3055
EXT_GPIO_2: CN7.8 S1.44 | length 2276
  Top Layer w10: S1.44@2142.68,2309.21 2142.68,2897.68 v1(2175,2930)
  Bottom Layer w10: v1(2175,2930) 2175,3058.63 2237.37,3121 3569,3121 CN7.8@3635,3055
EXT_GPIO_3: CN7.10 S1.45 | length 2414.6
  Top Layer w10: S1.45@2122.99,2309.21 2122.99,2314.22 2123.77,2315 2122.99,2315.78 2122.99,2937.99 v1(2145,2960)
  Bottom Layer w10: v1(2145,2960) 2145,3054.09 2229.91,3139 3651,3139 CN7.10@3735,3055
EXT_GPIO_4: CN7.12 S1.46 | length 2574.6
  Top Layer w10: S1.46@2103.31,2309.21 2104,2309.9 2104,2989 v1(2112.82,2997.82)
  Bottom Layer w10: v1(2112.82,2997.82) 2113.22,2998.22 2113.22,3047.76 2222.46,3157 3733,3157 CN7.12@3835,3055 3847.5,3042.5 CN7.12@3852.5,3042.5
EXT_I2C2_SCL: CN2.2 S1.47 | length 913.3
  Top Layer w10: S1.47@2083.62,2309.21 2083.22,2309.61 2083.22,3013.22 2125,3055 CN2.2@2275,3055
EXT_I2C2_SDA: CN2.4 S1.48 | length 1094.2
  Top Layer w10: S1.48@2063.94,2309.21 2063.94,3033.94 2145,3115 2315,3115 CN2.4@2375,3055
EXT_SPI1_MISO: CN2.14 S1.31 | length 995.8
  Top Layer w10: S1.31@2398.58,2309.21 2398.58,2568.58 v1(2460,2630)
  Bottom Layer w10: v1(2460,2630) 2627,2797 2717,2797 2825,2905 2825,3005 CN2.14@2875,3055
EXT_SPI1_MOSI: CN2.12 S1.32 | length 950.9
  Top Layer w10: S1.32@2378.9,2309.21 2378.9,2633.9 v1(2395,2650)
  Bottom Layer w10: v1(2395,2650) 2410,2650 2600,2840 2655,2840 2725,2910 2725,3005 CN2.12@2775,3055
EXT_SPI1_NSS: CN2.16 S1.29 | length 1029
  Top Layer w10: S1.29@2437.95,2309.21 2437.95,2510.34 2630,2702.38 v1(2630,2708.69)
  Bottom Layer w10: v1(2630,2708.69) 2733.69,2708.69 2925,2900 2925,3005 CN2.16@2975,3055
EXT_SPI1_SCK: CN2.10 S1.30 | length 1016.7
  Top Layer w10: v1(2395,2700) 2490,2700 2501.78,2688.22 2501.78,2599.62 2418.27,2516.11 S1.30@2418.27,2309.21
  Bottom Layer w10: v1(2395,2700) 2430,2700 2625,2895 2625,3005 CN2.10@2675,3055
EXT_TIM4_CH2: CN2.18 LED2.2 S1.60 | length 2886.8
  Top Layer w10: v1(1727,2920) LED2.2@1765,2920 ; v1(1885,2085) 1887.71,2085 1903.65,2069.05 S1.60@1961.57,2069.05 1962.3,2069.78 v1(2239.78,2069.78)
  Bottom Layer w10: v1@1725.5,2915.5 1720.5,2915.5 1670,2865 1670,2495 1885,2280 v1(1885,2085) ; v1(2239.78,2069.78) 2274.04,2069.78 2305,2100.74 2305,2210 2424,2329 2424,2439.76 2623.24,2639 2877.63,2639 3125,2886.37 3125,3005 CN2.18@3075,3055
EXT_TIM4_CH3: CN2.20 LED3.2 S1.61 | length 3198.3
  Top Layer w10: v1(1734,2988) 1735.91,2989.91 1739.91,2989.91 LED3.2@1765,3015 ; v1(1850,2065) 1865.32,2049.68 1961.26,2049.68 S1.61@1961.57,2049.37 1961.89,2049.68 2200.32,2049.68 v1(2225,2025)
  Bottom Layer w10: v1(1734,2988) 1650,2904 1650,2485 1850,2285 v1(1850,2065) ; v1(2225,2025) 2312.87,2025 2345,2057.13 2345,2194.54 2460,2309.54 2460,2424.85 2638.15,2603 2892.54,2603 2942.54,2653 3003,2653 3255,2905 3255,2980 CN2.20@3180,3055
EXT_TIM4_CH4: CN2.11 S1.62 | length 1450.3
  Top Layer w10: S1.62@1961.57,2029.68 2055.32,2029.68 2075,2010 2150,2010 v1(2160,2020)
  Bottom Layer w10: v1(2160,2020) 2160,2180 2210,2230 2210,2260 2315,2365 2315,2525 2605,2815 2690,2815 2775,2900 CN2.11@2775,2955
EXT_USART6_RX: CN7.16 S1.64 | length 2956.1
  Top Layer w10: S1.64@1961.57,1990.31 2039.69,1990.31 2058,1972 2353,1972 v1(2359,1966) ; v1(3185,2195) 3325,2195 3415,2285 v1(3415,2290)
  Bottom Layer w10: v1(2359,1966) 2406.78,2013.78 2406.78,2179.96 2518,2291.18 2518,2342.54 2580.46,2405 2690,2405 2755,2340 3025,2340 3170,2195 v1(3185,2195) ; v1(3415,2290) 3540,2415 3595,2415 3985,2805 3985,3005 CN7.16@4035,3055
EXT_USART6_TX: CN7.14 S1.63 | length 2806.1
  Top Layer w10: S1.63@1961.57,2010 2045.46,2010 2063.46,1992 2347,1992 v1(2365,2010) ; v1(3170,2240) 3310.49,2240 v1(3365,2294.51)
  Bottom Layer w10: v1(2365,2010) 2385,2030 2385,2183.63 2500,2298.63 2500,2350 2575,2425 2695.46,2425 2760.46,2360 3045,2360 3165,2240 v1(3170,2240) ; v1(3365,2294.51) 3745,2674.51 3745,2685 3885,2825 3885,3005 CN7.14@3935,3055
FLASH_SPI_CS: S1.51 U6.1 | length 851.1
  Top Layer w10: U6.1@1455,1685 1455,1800 1575,1920 1575,1996.37 1824.85,2246.22 S1.51@1961.57,2246.22
FLASH_SPI_MISO: S1.53 U6.2 | length 992.1
  Top Layer w10: U6.2@1405,1685 1405,1650 1440,1615 1485,1615 1540,1670 1540,1834.09 1615,1909.09 1615,1985.46 1836.39,2206.85 S1.53@1961.57,2206.85
FLASH_SPI_MOSI: S1.54 U6.5 | length 1496.2
  Top Layer w10: v1(1270,1830) 1270,1825 1145,1700 1145,1520 1257.95,1407.05 U6.5@1305,1407.05 ; v1(1575,1805) 1575,1843.63 1635,1903.63 1635,1980 1842.17,2187.17 S1.54@1961.57,2187.17
  Bottom Layer w10: v1(1270,1830) 1550,1830 v1(1575,1805)
FLASH_SPI_SCK: S1.52 U6.6 | length 1432.3
  Top Layer w10: v1(1290,1795) 1187,1692 1187,1624.26 1226.26,1585 1265,1585 1355,1495 U6.6@1355,1407.05 ; v1(1500,1795) 1515,1810 1515,1834.54 1595,1914.54 1595,1990.91 1830.62,2226.54 S1.52@1961.57,2226.54
  Bottom Layer w10: v1(1290,1795) v1(1500,1795)